# Altium PCB FAT44_1.PcbDoc
Units mm, origin at the board's own origin, x right, y up, seen from the top; angles counter-clockwise.
Board outline 354.7 x 156.7 mm, 2 copper layers (Top Layer, Bottom Layer); 9 components, 540 nets, 32 pads, 0 vias.
Unrouted connection lines stored in the file: 2.
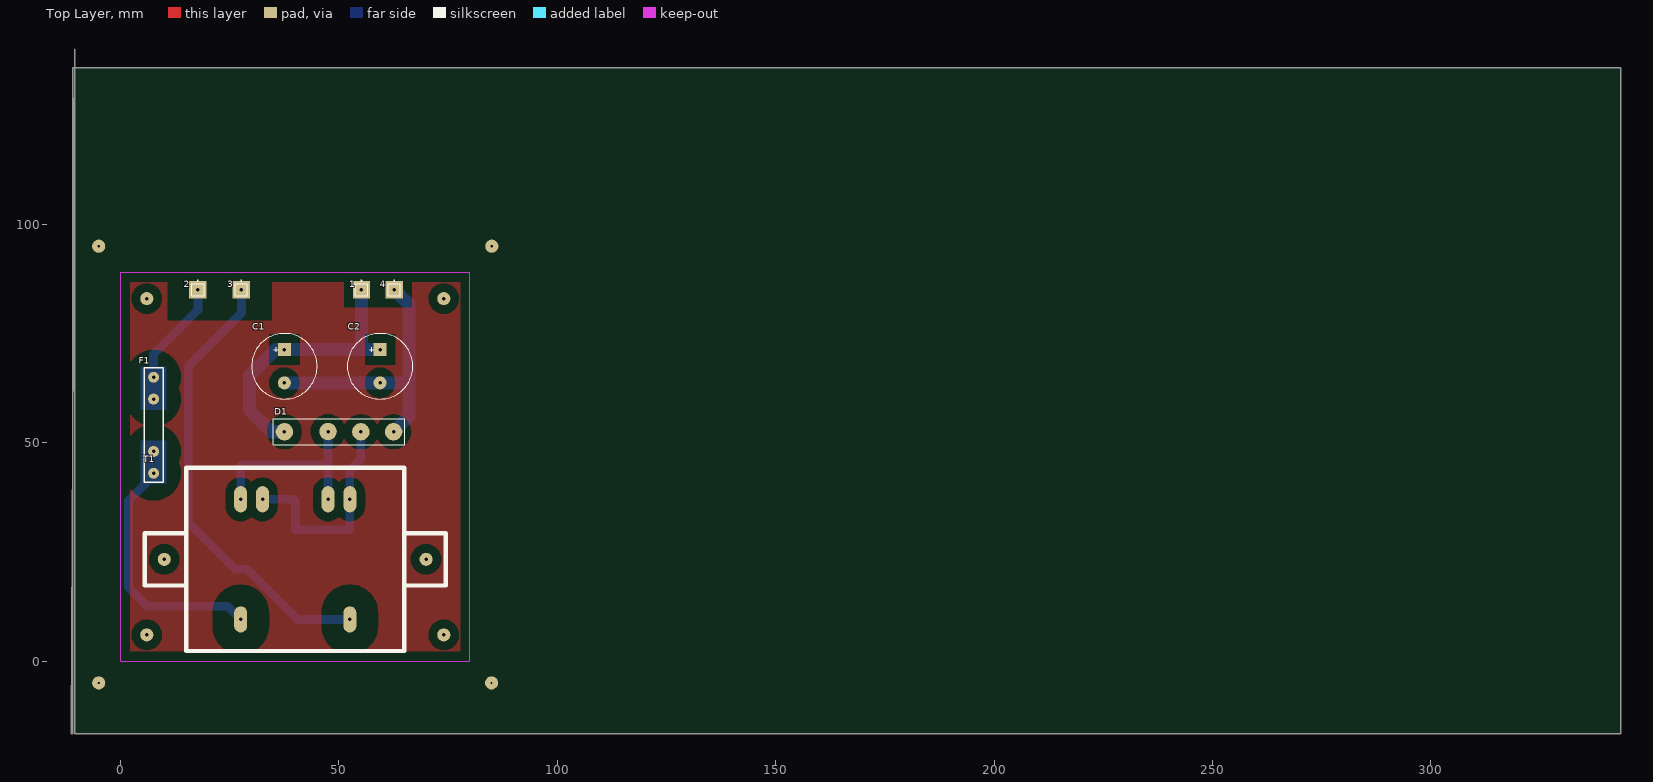
[diagram p0: Top Layer view]
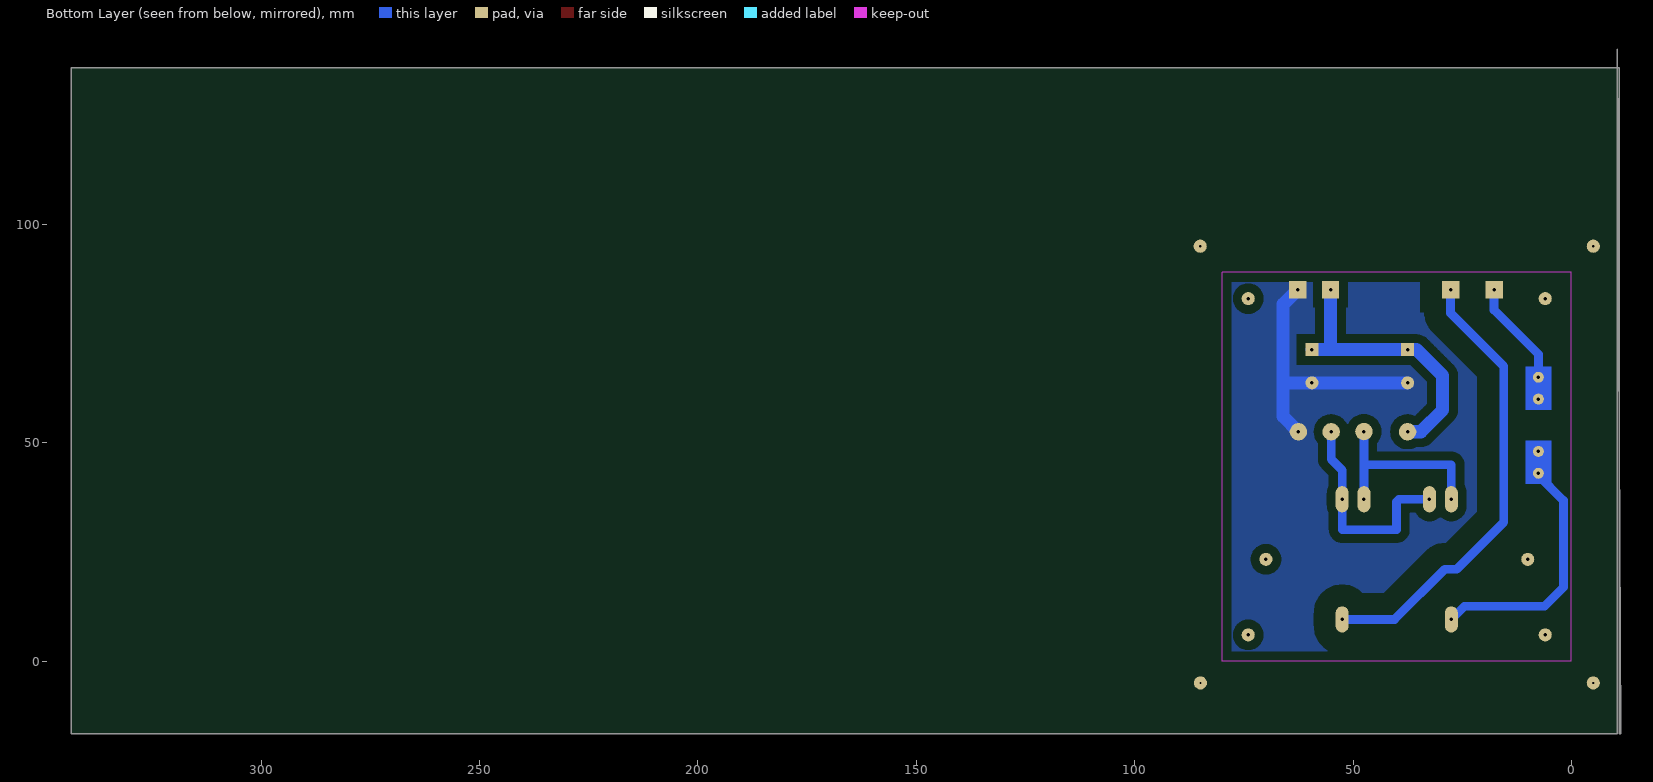
[diagram p1: Bottom Layer view, seen from below]

## Layer stack, top to bottom
Top Layer: signal copper 0.0356
Dielectric: dielectric 0.32, FR-4, Dk 4.8
Bottom Layer: signal copper 0.0356

## Board outline
-10.547,140.05 -10.547,-16.65 343.453,-16.65 343.453,135.9 -10.897,135.9 -10.897,-16.65 -11.247,-16.65

## Design rules (kind name [scope] priority, off if disabled: settings)
Clearance Clearance_2 [All vs InNet('Net2_1') or
InNet('Net3_1') or
InNet('NetF1_2')] p1: gap=5
Clearance Clearance_1 [All vs InPoly] p2: gap=2
Clearance [All] p3: gap=0.254
ComponentClearance [All] p1: gap=0.254 collisioncheckmode=0
HoleSize [All] p1: absolutevalues=TRUE maxlimit=5 minlimit=0.025 maxpercent=80.000 minpercent=20.000
PolygonConnect PolygonConnect_2 [InNet(GND_P)] p1: connectstyle=Direct reliefconductorwidth=0.254 reliefentries=4 polygonreliefangle="90 Angle"
PolygonConnect PolygonConnect_1 [InNet(NetC100_2)] p2: connectstyle=Direct reliefconductorwidth=0.254 reliefentries=4 polygonreliefangle="90 Angle"
PolygonConnect [All] p3: connectstyle=Relief reliefconductorwidth=0.4 reliefentries=4 polygonreliefangle="90 Angle"
RoutingLayers [All] p1: top layer=Horizontal bottom layer=Vertical
RoutingVias [All] p1: holewidth=0.7 width=1.2 viastyle="Through Hole" minholewidth=0.6 minwidth=1.1 maxholewidth=0.7 maxwidth=1.2
SolderMaskExpansion [All] p1: expansion=0.102
TestPointUsage [All] p1: valid=0 allowmultiple=FALSE
Testpoint [All] p1: side=15 testpointundercomponent=TRUE minsize=1.016 maxsize=2.54 preferedsize=1.524 minholesize=0 maxholesize=1.016 preferedholesize=0.813 testpointgrid=0.025 style=1023 order=1234567890
Width [All] p1: maxlimit=3 minlimit=0.2 preferedwidth=0.254 toplayer_prefwidth=1 bottomlayer_prefwidth=3 minimp=50.000000 maximp=50.000000 favimp=50.000000
15 further rules are at their usual default settings.

## Components (designator, comment, footprint, x,y, rotation, side; value= is the part's Value field where it differs from the comment)
1 "Socket_Ring" PIN1 55.15,85.05 r0 top
2 "Socket_Ring" PIN1 17.704,85.05 r0 top
3 "Socket_Ring" PIN1 27.65,85.05 r0 top
4 "Socket_Ring" PIN1 62.65,85.05 r0 top
C1 "" EL8 37.5,63.7 r90 top
C2 "" EL8 59.4,63.7 r90 top
D1 "Bridge1" GSIB2580 50.013,52.513 r0 top
F1 "Fuse 1" FUSE3 7.55,65 r270 top
T1 "BV EI 483 1259" "BV EI 483 1259_LUT" 40,23.3 r0 top

## Footprints (in the part's own frame and the unit in brackets; to place one, negate y for a bottom-side part, rotate by r counter-clockwise, add the part's x,y. Pads: shape width x height; smd on the part's side, far side on the other; paste and mask are expansions set on the pad)
"BV EI 483 1259_LUT" [mm]
  round 3 hole 0.8: 0(-30,0) 0(29.95,0)
  oval 3x6 hole 0.8: 1(-12.5,-13.75) 6(12.5,-13.75) 7(-12.5,13.75) 8(-7.5,13.75) 11(7.5,13.75) 12(12.5,13.75)
  silkscreen extent -34.5,-21 34.45,21
EL8 [mm]
  rect 3x3 hole 0.8: 1(7.611,-0.011)
  round 3 hole 0.8: 2(0.011,-0.011)
  silkscreen extent -3.69,-7.51 11.31,7.49
FUSE3 [mm]
  round 2.5 hole 0.8: 1(0,0) 1(5,0) 2(17,0) 2(22,0)
  Bottom Layer region: -2.5,-3 7.5,-3 7.5,3 -2.5,3
  Bottom Layer region: 24.5,3 14.5,3 14.5,-3 24.5,-3
  silkscreen extent -2.13,-2.16 24.1,2.24
GSIB2580 [mm]
  round 4 hole 0.8: 1(12.5,0) 2(-2.5,0.05) 3(-12.5,0) 4(5,0)
  silkscreen extent -15,-3 15,3
PIN1 [mm]
  rect 4x4 hole 0.8: 1(0.012,0.005)
  silkscreen extent -1.39,-1.4 1.41,2.18

## Part data
1 2 3 4: "Socket"
C1 C2: library part "Cap Pol1", "Polarized Capacitor (Radial)"
D1: "Full Wave Diode Bridge"
F1: "Fuse"

## Free pads (board coordinates)
  round 3 hole 0.5: 0(-5,95) 1(85,95) 2(-5,-5) 3(84.95,-5)
  round 3 hole 0.8: 0(6,6) 1(6,83) 2(74,83) 3(74,6)

## Nets (pads, with @x,y where several pads share a name; then routed paths per layer and width w, separated by ;. In a path a pad name is that pad's centre, name@x,y a point inside that pad or via, vN(x,y) a via of type N, cw(c..) or ccw(c..) an arc to the next point about the centre after c; other vN are vias at no path point)
+1.8V: 
+3.3V: 
+3V3: 
+5V: 
+5V_IZ: 
+IAKB1: 
+IAKB2: 
+UOUT: 
-5V: 
-5V_IZ: 
-IAKB1: 
-IAKB2: 
-UOUT: 
BAT: 
CANH: 
CANL: 
DB0: 
DB1: 
DB2: 
DB3: 
DB4: 
DB5: 
DB6: 
DB7: 
DT1: 
DT2: 
DT3: 
DT4: 
DT5: 
GND: 
GND_P: 
Net1_1: 1.1 C1.1 C2.1 D1.3 | length 64.1
  Bottom Layer w3: D1.3 34.487,52.513 29.5,57.5 29.5,65.35 35.461,71.311 C2.1 ; 55.15,71.311 55.162,71.323 1.1
Net2_1: 2.1 F1.1 | length 24.3
  Bottom Layer w2: F1.1@7.55,65 7.55,70.25 17.716,80.416 2.1
Net3_1: 3.1 T1.6 | length 104.5
  Bottom Layer w2: 3.1 27.662,79.662 15.5,67.5 15.5,31.8 26.25,21.05 29,21.05 40.5,9.55 T1.6
Net4_1: 4.1 C1.2 C2.2 D1.1 | length 63.9
  Bottom Layer w3: C1.2 65.911,63.711 66,63.8 ; D1.1 66,56.001 66,81.716 4.1
NetA1_1: 
NetA1_2: 
NetBT2_1: 
NetBT2_2: 
NetBT700_1: 
NetC2_1: 
NetC2_2: 
NetC11_1: 
NetC11_2: 
NetC12_2: 
NetC14_2: 
NetC21_1: 
NetC22_1: 
NetC23_1: 
NetC33_1: 
NetC35_2: 
NetC36_2: 
NetC45_1: 
NetC45_2: 
NetC46_1: 
NetC46_2: 
NetC47_2: 
NetC48_1: 
NetC48_2: 
NetC49_1: 
NetC50_2: 
NetC51_2: 
NetC52_2: 
NetC53_2: 
NetC61_1: 
NetC61_2: 
NetC62_2: 
NetC63_2: 
NetC66_1: 
NetC302_1: 
NetC302_2: 
NetC500_2: 
NetC502_1: 
NetC502_2: 
NetC505_1: 
NetC505_2: 
NetC508_1: 
NetC510_1: 
NetC511_1: 
NetC511_2: 
NetC512_2: 
NetC513_2: 
NetC514_1: 
NetC516_1: 
NetC516_2: 
NetC517_1: 
NetC600_1: 
NetC600_2: 
NetC700_1: 
NetC700_2: 
NetC701_1: 
NetC702_1: 
NetC704_2: 
NetC705_2: 
NetC706_1: 
NetC707_1: 
NetC707_2: 
NetC709_1: 
NetC709_2: 
NetC710_1: 
NetC713_1: 
NetC714_1: 
NetC715_1: 
NetD1_2: D1.2 T1.7 T1.11 | length 43.5
  Bottom Layer w2: T1.7 27.5,44.95 47.463,44.95 47.513,45 ; T1.11 47.513,37.063 D1.2
NetD1_4: D1.4 T1.8 T1.12 | length 50.2
  Bottom Layer w2: T1.8 39.5,37.05 40.05,36.5 40.05,30.05 52.5,30.05 52.5,43.7 55.013,46.213 D1.4
NetD3_1: 
NetD3_2: 
NetD5_1: 
NetD20_2: 
NetD500_1: 
NetD500_2: 
NetD501_1: 
NetD503_1: 
NetD505_1: 
NetD505_2: 
NetD506_1: 
NetD700_1: 
NetD701_1: 
NetD702_1: 
NetD703_2: 
NetD704_1: 
NetD705_1: 
NetD706_1: 
NetDS1_1: 
NetDS1_2: 
NetF1_2: F1.2 T1.1 | length 56.9
  Bottom Layer w2: F1.2@7.7,42.65 1.8,36.75 1.8,16.9 6.15,12.55 24.5,12.55 T1.1
NetFU500_1: 
NetFU700_1: 
NetFU700_2: 
NetJ1_2: 
NetJ1_3: 
NetJ1_4: 
NetJ1_7: 
NetJ301_1: 
NetJ301_2: 
NetJ301_3: 
NetJ301_6: 
NetJ301_10: 
NetJ301_11: 
NetJ600_1: 
NetJP2_1: 
NetJP2_2: 
NetJP3_3: 
NetJP3_3: 
NetJP5_5: 
NetJP5_6: 
NetJP5_7: 
NetJP5_9: 
NetJP5_10: 
NetJP5_11: 
NetJP5_12: 
NetJP9_1: 
NetJP10_1: 
NetJP10_2: 
NetJP10_3: 
NetJP10_4: 
NetJP10_5: 
NetJP10_6: 
NetJP11_1: 
NetQ1_1: 
NetQ1_2: 
NetQ2_1: 
NetQ2_3: 
NetQ4_1: 
NetQ5_2: 
NetQ6_1: 
NetQ7_2: 
NetQ7_4: 
NetQ8_2: 
NetQ8_4: 
NetQ9_2: 
NetQ9_4: 
NetQ10_1: 
NetQ10_3: 
NetQ10_3: 
NetQ11_1: 
NetQ11_1: 
NetQ11_3: 
NetQ500_1: 
NetQ501_1: 
NetQ600_1: 
NetQ600_3: 
NetQ700_1: 
NetQ700_3: 
NetR3_1: 
NetR3_2: 
NetR3_2: 
NetR3_2: 
NetR3_2: 
NetR3_2: 
NetR3_2: 
NetR3_2: 
NetR4_1: 
NetR4_2: 
NetR5_1: 
NetR5_2: 
NetR6_1: 
NetR6_2: 
NetR7_1: 
NetR7_2: 
NetR7_2: 
NetR8_1: 
NetR8_1: 
NetR8_2: 
NetR8_2: 
NetR14_2: 
NetR20_1: 
NetR22_2: 
NetR22_2: 
NetR22_2: 
NetR22_2: 
NetR22_2: 
NetR22_2: 
NetR22_2: 
NetR22_2: 
NetR22_2: 
NetR25_1: 
NetR30_2: 
NetR38_1: 
NetR42_1: 
NetR42_2: 
NetR43_1: 
NetR43_2: 
NetR43_2: 
NetR44_1: 
NetR44_2: 
NetR44_2: 
NetR45_2: 
NetR49_1: 
NetR49_2: 
NetR51_1: 
NetR51_2: 
NetR52_1: 
NetR53_1: 
NetR57_1: 
NetR60_1: 
NetR69_2: 
NetR83_1: 
NetR86_1: 
NetR90_2: 
NetR91_1: 
NetR93_1: 
NetR95_1: 
NetR96_2: 
NetR112_1: 
NetR113_1: 
NetR114_1: 
NetR115_1: 
NetR116_1: 
NetR117_2: 
NetR120_1: 
NetR305_2: 
NetR306_2: 
NetR504_1: 
NetR505_2: 
NetR505_2: 
NetR510_1: 
NetR600_1: 
NetR600_2: 
NetR603_1: 
NetR603_2: 
NetR605_2: 
NetR702_2: 
NetR704_2: 
NetR705_1: 
NetS2_1: 
NetU1_1: 
NetU1_4: 
NetU1_5: 
NetU3_13: 
NetU3_14: 
NetU3_16: 
NetU5_1: 
NetU8_3: 
NetU8_7: 
NetU8_8: 
NetU11_5: 
NetU14_3: 
NetU14_4: 
NetU14_5: 
NetU14_6: 
NetU14_12: 
NetU14_13: 
NetU14_14: 
NetU15_3: 
NetU15_3: 
NetU15_3: 
NetU15_3: 
NetU15_4: 
NetU15_5: 
NetU15_5: 
NetU15_5: 
NetU15_5: 
NetU15_5: 
NetU15_5: 
NetU15_7: 
NetU15_7: 
NetU15_9: 
NetU15_10: 
NetU15_15: 
NetU16_3: 
NetU16_4: 
NetU16_6: 
NetU19_4: 
NetU21_1: 
NetU21_2: 
NetU503_4: 
NetU600_3: 
NetU700_4: 
NetX13_1: 
NetX15_1: 
NetX23_1: 
NetX32_1: 
NetX33_1: 
OFF1: 
OFF2: 
P0_0: 
P0_1: 
P0_2: 
P0_2: 
P0_2: 
P0_2: 
P0_2: 
P0_2: 
P0_3: 
P0_3: 
P0_3: 
P0_3: 
P0_3: 
P0_3: 
P0_3: 
P0_4: 
P0_5: 
P0_6: 
P0_7: 
P0_8: 
P0_8: 
P0_8: 
P0_8: 
P0_8: 
P0_8: 
P0_8: 
P0_8: 
P0_8: 
P0_8: 
P0_8: 
P0_8: 
P0_8: 
P0_8_: 
P0_8_: 
P0_8_: 
P0_9: 
P0_9: 
P0_9: 
P0_9_: 
P0_9_: 
P0_9_: 
P0_9_: 
P0_10: 
P0_11: 
P0_13: 
P0_15: 
P0_16: 
P0_17: 
P0_18: 
P0_19: 
P0_19: 
P0_20: 
P0_21: 
P0_23: 
P0_24: 
P0_25: 
P0_25: 
P0_25: 
P0_25: 
P0_25: 
P0_25: 
P0_25: 
P0_25: 
P0_25: 
P0_25: 
P0_25: 
P0_27: 
P0_27: 
P0_27: 
P0_27: 
P0_27: 
P0_27: 
P0_27: 
P0_27: 
P0_27: 
P0_27: 
P0_27: 
P0_27: 
P0_27: 
P0_28: 
P0_29: 
P0_30: 
P1_0: 
P1_1: 
P1_4: 
P1_8: 
P1_9: 
P1_10: 
P1_14: 
P1_15: 
P1_16: 
P1_17: 
P1_18: 
P1_19: 
P1_20: 
P1_21: 
P1_21: 
P1_22: 
P1_22: 
P1_22: 
P1_22: 
P1_22: 
P1_22: 
P1_22: 
P1_22: 
P1_23: 
P1_24: 
P1_25: 
P1_25: 
P1_25: 
P1_25: 
P1_25: 
P1_25: 
P1_26: 
P1_27: 
P1_28: 
P1_29: 
P1_29: 
P1_29: 
P1_29: 
P1_29: 
P1_30: 
P1_31: 
P1_31: 
P1_31: 
P1_31: 
P1_31: 
P1_31: 
P1_31: 
P1_31: 
P1_31: 
P1_31: 
P1_31: 
P1_31: 
P1_31: 
P1_31: 
P2_0: 
P2_1: 
P2_7: 
P2_8: 
P2_9: 
P2_10: 
P2_13: 
P3_25: 
P3_26: 
PB1: 
PB1: 
PB2: 
PB2: 
PB3: 
PB3: 
PE6: 
PE6: 
PE7: 
PQ3: 
PQ4: 
PQ5: 
PQ6: 
PROG0: 
PROG1: 
PROG1: 
PROG1: 
PWM: 
PWM1: 
PWM2: 
REL1: 
REL1: 
REL2: 
REL3: 
REL4: 
REL5: 
REL6: 
RES: 
RX: 
RXCAN: 
SK1: 
SK2: 
SK3: 
SK4: 
T3: 
T3: 
TD1: 
TX: 
U2: 
U5: 
U6: 
U7: 
U8: 
UAKB: 
UB1: 
UB2: 
UBM1: 
UBM2: 
UIB1: 
UIB2: 
ULOAD: 
US: 
US1: 
US1: 
US1: 
US1: 
US1: 
US1: 
US1: 
US1: 
US1: 
UU1: 
UU2: 
UU3: 
UU4: 
UU5: 
UU6: 
UU7: 
UU8: 
UU9: 
UU10: 
UU11: 
UU12: 
UU13: 
UU14: 
VBAT: 
VREF: 
VS: 
VS: 
pads on no net: T1.0

## Polygon pours and split planes (outlines as drawn)
no net on Top Layer (hatched 90Degree grid 0.1 track 0.3): 0.55,88.6 0.55,0.5 79.3,0.5 79.3,88.5 0.45,88.5
Net4_1 on Bottom Layer (hatched 90Degree grid 0.1 track 0.3, remove dead copper): -2.65,93.45 -2.65,-3.55 82.95,-3.55 82.95,92.65 -2.8,92.65 -2.8,92.4

## Keep-outs
Keep-Out Layer:
  lines w0.25: 0,0 80,0 80,89 0,89 0,0

## Dimensions
0,0 to 0,89 on Mechanical 1
6,83 to 6,6 on Mechanical 1
6,83 to 74,83 on Mechanical 1
80,89 to 0,89 on Mechanical 1